# Altium PCB Relay_module.PcbDoc
Units mil, origin at the board's own origin, x right, y up, seen from the top; angles counter-clockwise.
Board outline 3415 x 1995 mil, 2 copper layers (Top Layer, Bottom Layer); 18 components, 21 nets, 53 pads, 2 vias.
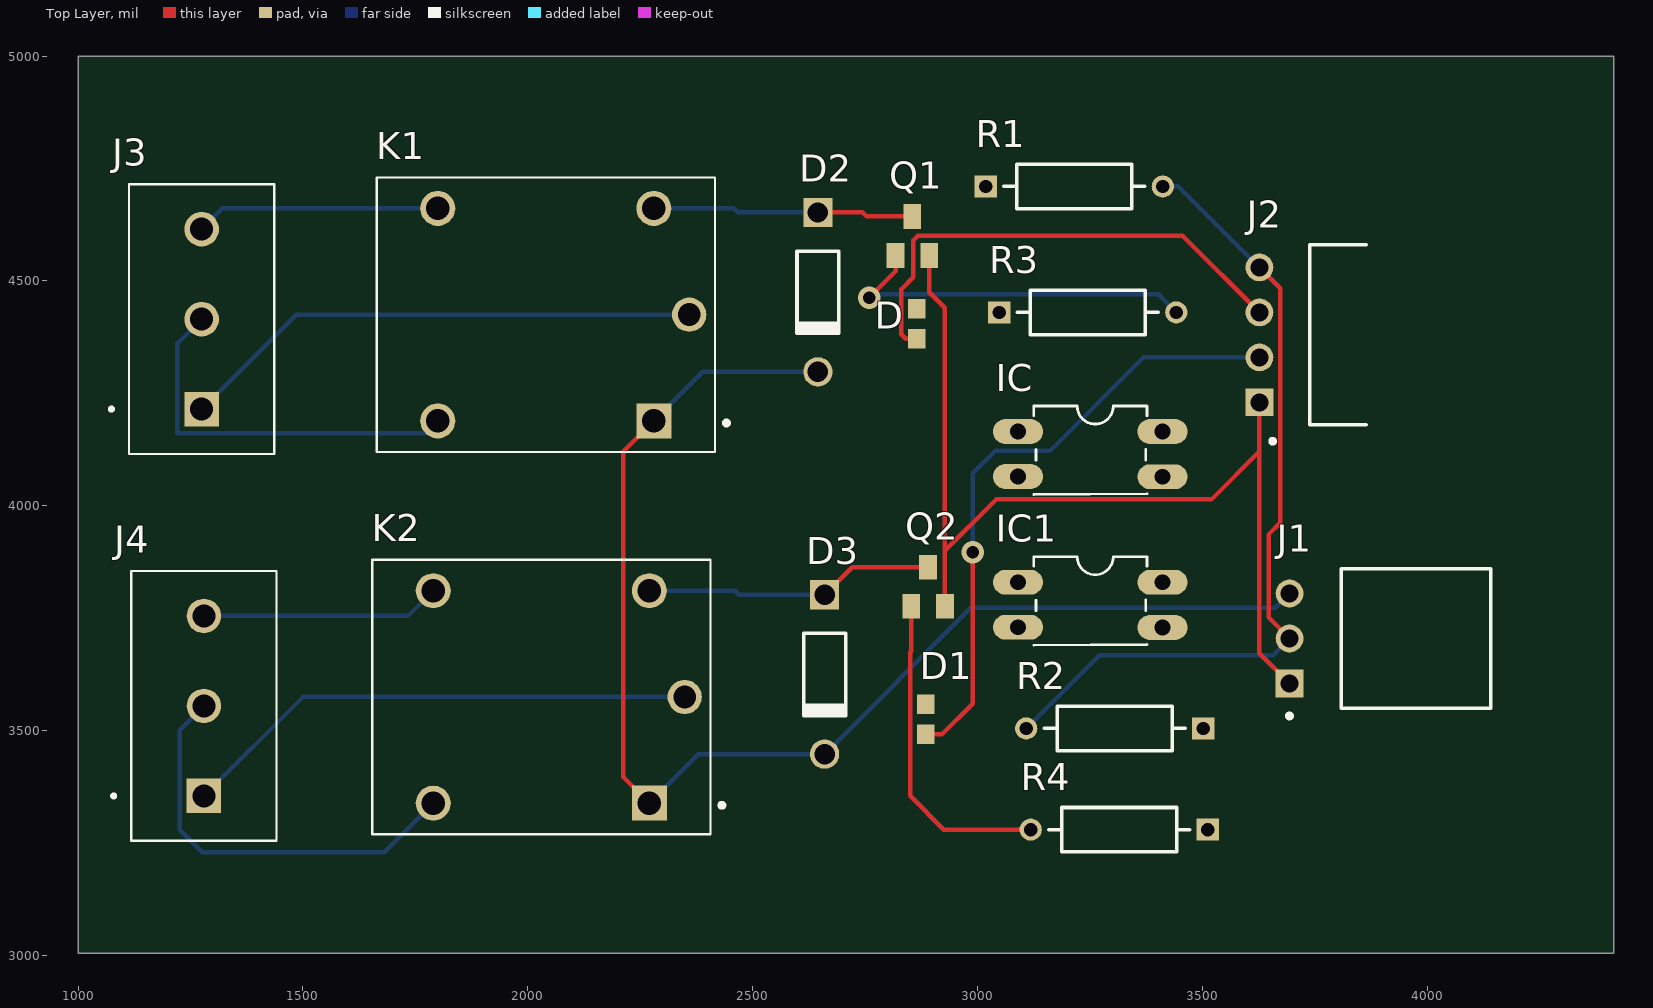
[diagram p0: Top Layer view]
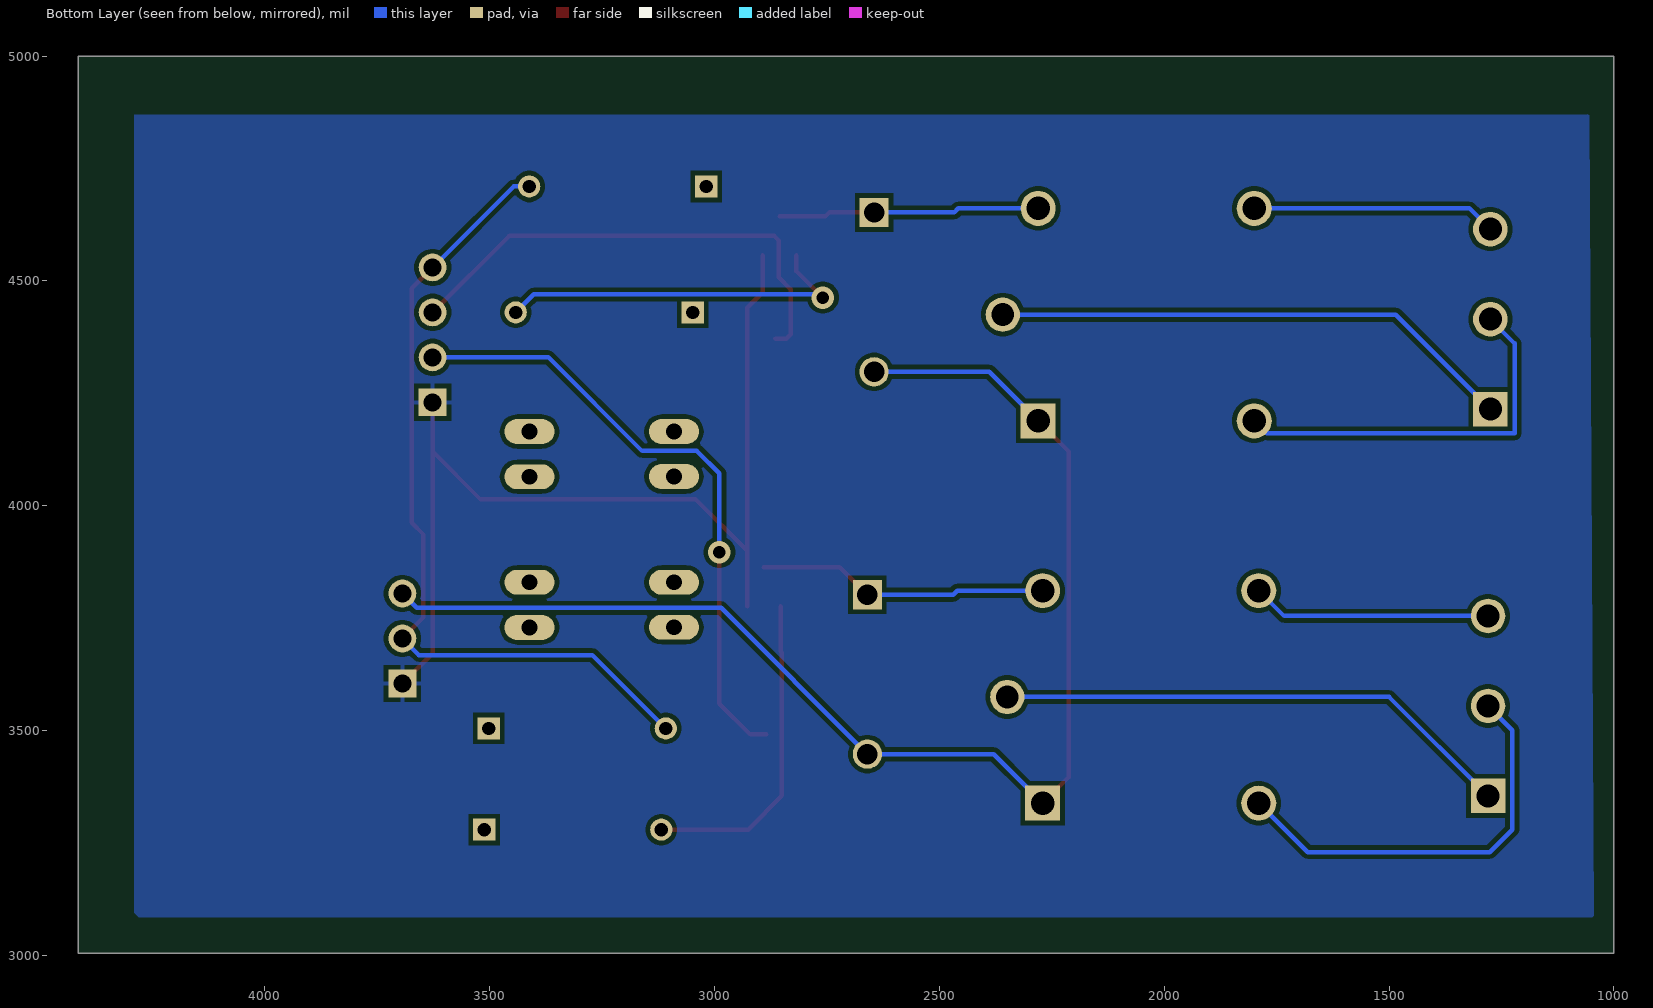
[diagram p1: Bottom Layer view, seen from below]
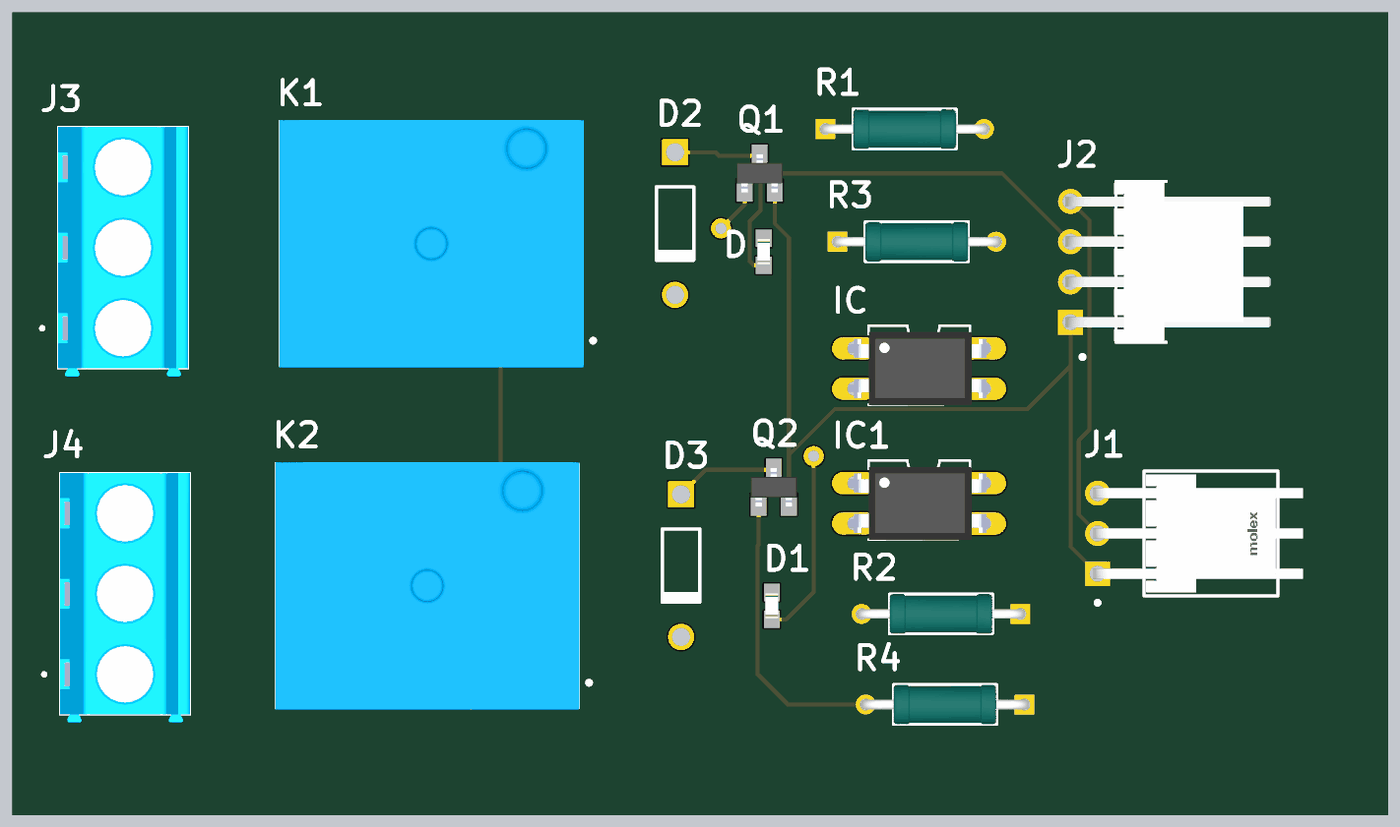
[diagram p2: 3D render of the assembled board from above, using the file's embedded part models]

## Layer stack, top to bottom
Top Solder: solder mask 0.4, Solder Resist, Dk 3.5
Top Layer: signal copper 1.4
Dielectric 1: dielectric 12.6, FR-4, Dk 4.8
Bottom Layer: signal copper 1.4
Bottom Solder: solder mask 0.4, Solder Resist, Dk 3.5

## Board outline
1000,3005 4415,3005 4415,5000 1000,5000

## Design rules (kind name [scope] priority, off if disabled: settings)
Clearance [All] p1: gap=6 ignorepadtopadclearanceinfootprint=FALSE
PolygonConnect [All] p1: connectstyle=Relief reliefconductorwidth=10 reliefentries=4 polygonreliefangle="90 Angle" airgapwidth=10
RoutingVias [All] p1: holewidth=28 width=50 viastyle="Through Hole" minholewidth=28 minwidth=50 maxholewidth=28 maxwidth=50
SilkToSolderMaskClearance [IsPad] p1: minsilkscreentomaskgap=5 clearancetoexposedcopper=TRUE
SolderMaskExpansion [All] p1: expansion=4 istentingtop=FALSE
Width [All] p1: maxlimit=10 minlimit=10 preferedwidth=10
29 further rules are at their usual default settings.

## Components (designator, comment, footprint, x,y, rotation, side; value= is the part's Value field where it differs from the comment)
D "LTST-C193TBKT-5A" 0603 2865,4405 r90 top
D1 "LTST-C193TBKT-5A" 0603 2885,3525 r90 top
D2 "1N4003-T" DIOD-DO-41-P-2_V 2645,4475 r270 top
D3 "1N4003-T" DIOD-DO-41-P-2_V 2660,3625 r270 top
IC "LTV-817" DIP-4 3110,4165 r270 top
IC1 "LTV-817" DIP-4 3110,3830 r270 top
J1 "22-05-3031" FP-22-05-3031-MFG 3975,3705 r90 top
J2 "22-05-3041" FP-22-05-3041-MFG 3905,4380 r90 top
J3 "TB006-508-03BE" CUI_TB006-508-03BE 1275,4215 r90 top
J4 "TB006-508-03BE" CUI_TB006-508-03BE 1280,3355 r90 top
K1 "SRD-05VDC-SL-C" RELAY_SRD-05VDC-SL-C 2040,4425 r180 top
K2 "SRD-05VDC-SL-C" RELAY_SRD-05VDC-SL-C 2030,3575 r180 top
Q1 "BCW31*" SOT23-BEC 2855,4600 r0 top
Q2 "BCW31*" SOT23-BEC 2890,3820 r0 top
R1 "MRS25000C1000FRP00" FP-MRS25-MFG 3215,4710 r0 top
R2 "MRS25000C1000FRP00" FP-MRS25-MFG 3305,3505 r180 top
R3 "MRS25000C1000FRP00" FP-MRS25-MFG 3245,4430 r0 top
R4 "MRS25000C1000FRP00" FP-MRS25-MFG 3315,3280 r180 top

## Footprints (in the part's own frame and the unit in brackets; to place one, negate y for a bottom-side part, rotate by r counter-clockwise, add the part's x,y. Pads: shape width x height; smd on the part's side, far side on the other; paste and mask are expansions set on the pad)
0603 [mm]
  rect 1.1x1 smd: 1(-0.85,0) 2(0.85,0)
  body extent -0.8,-0.4 0.8,0.4, height 0.36
CUI_TB006-508-03BE [mm]
  rect 1.95x1.95 / inner round 1.95 / far side rect 1.95x1.95 hole 1.3: 1(0,0)
  round 1.95 hole 1.3: 2(5.08,0) 3(10.16,0)
  silkscreen extent -2.54,-4.1 12.7,5.2, body extent -3.04,-4.1 12.7,4.1, height 10
DIOD-DO-41-P-2_V [mm] "2-Leads, Axial Lead, Body 4.635x2.36mm, Pin Spacing 9mm"
  rect 1.65x1.65 hole 1.15: 1(-4.5,0)
  round 1.65 hole 1.15: 2(4.5,0)
  silkscreen extent -2.32,-1.18 2.32,1.18, body extent -4.93,-1.18 4.93,1.18, height 2.35
DIP-4 [mm]
  oval 1.408x2.816 hole 0.9: P$1(0,-0.508) P$2(2.54,-0.508) P$3(2.55,7.65) P$4(0,7.65)
  silkscreen extent -1.44,0.38 3.56,6.77, body extent -1.03,-0.89 3.57,8.17, height 5
FP-22-05-3031-MFG [mm]
  rect 1.57x1.57 hole 1.02 paste-2539.97 mask+0: 1(-2.54,7.14)
  round 1.57 hole 1.02 paste-2539.97 mask+0: 2(0,7.14) 3(2.54,7.14)
  silkscreen extent -4.5,-4.21 3.94,7.27, body extent -4.04,-6.02 4.04,8.03, height 0.25
FP-22-05-3041-MFG [mm]
  rect 1.57x1.57 hole 1.02 paste-2539.97 mask+0: 1(-3.81,7.072)
  round 1.57 hole 1.02 paste-2539.97 mask+0: 2(-1.27,7.072) 3(1.27,7.072) 4(3.81,7.072)
  silkscreen extent -6.13,1.03 5.08,6.44, body extent -5.18,-6.28 5.18,7.96, height 0.25
FP-MRS25-MFG [mm]
  rect 1.25x1.25 hole 0.75 paste-2539.97 mask+0: 1(-5,0)
  round 1.25 hole 0.75 paste-2539.97 mask+0: 2(5,0)
  silkscreen extent -3.97,-1.25 3.97,1.25, body extent -5.72,-1.35 5.72,1.35, height 0.25
RELAY_SRD-05VDC-SL-C [mm]
  rect 1.98x1.98 / inner round 1.98 / far side rect 1.98x1.98 hole 1.32: A1(-6.1,6)
  round 1.98 hole 1.32: A2(-6.1,-6) NC(6.1,6) NO(6.1,-6)
  round 1.935 hole 1.29: COM(-8.1,0)
  silkscreen extent -10.3,-7.75 9.55,7.75, body extent -9.6,-7.8 9.6,7.8, height 15.8
SOT23-BEC [mm]
  rect 1x1.4 smd: B(-0.95,-1.1) C(0,1.1) E(0.95,-1.1)
  body extent -1.45,-1.2 1.45,1.2, height 1.14

## Part data
D D1: "Blue 470nm LED Indication - Discrete 2.8V 0603 _1608 Metric_", Package="0603 Lite-On", Digi-Key_Part_Number=160-1827-1-ND, Digi-Key_Purchase_URL=https://www.digikey.com/product-detail/en/lite-on-inc/LTST-C193TBKT-5A/160-1827-1-ND/2355044?utm_source=snapeda&utm_medium=aggregator&utm_campaign=symbol, MF="Lite-On Inc.", MP=LTST-C193TBKT-5A, SnapEDA_Link=https://www.snapeda.com/parts/LTST-C193TBKT-5A/Lite-On%20Inc./view-part/350303/?ref=snap
D2 D3: library part CMP-0639-00004-2, "1.0 A Rectifier, 15 pF, 200 V, -65 to 150 degC, 2-Pin DO-41 Plastic, RoHS, Tape and Reel", Manufacturer="Diodes Inc", Max. Average Rectified Current IO (A)=1, Operating Temperature Range (degC)="-65 to 150", ComponentLink1Description="Manufacturer URL", ComponentLink1URL=http://diodes.com/, ComponentLink2Description=Datasheet, ComponentLink2URL=http://diodes.com/datasheets/ds28002.pdf, CT (pF)=15, DatasheetVersion="Rev. 8-2", Max. IFSM (A)=30, Max. IR (uA)=5, Mounting Technology="Through Hole", PackageDescription="2-Pin Axial Lead, Body 4.635 x 2.36 mm, Lead Spread 25.4 mm", PackageReference=DO-41-P-2, Packing="Tape and Reel", PartNumber=1N4003-T, RoHS=TRUE, VF (V)=1, VRRM (V)=200
IC IC1: "Optoisolator Transistor Output 5000Vrms 1 Channel 4-SMD", Package="DIP-4 Lite-On Electronics", Availability=Unavailable, MF="Lite-On Electronics", MP=LTV-817, Price=None, SnapEDA_Link=https://www.snapeda.com/parts/LTV-817/ICS/view-part/4478599/?ref=snap
J1: library part CMP-04776-000253-1, "CONN HEADER R/A 3POS 2.54MM", Color=White, Contact Resistance=10mR, Current Rating=4A, Flammability Rating="UL94 V-0", Insulation Resistance=50GR, Max Operating Temperature=75°C, Min Operating Temperature=0°C, Package Quantity=2000, Voltage Rating=250V, Approvals=UL, Contact Material=Brass, Contact Mating Length=0.264inch, Contact Plating=Tin, Contact Type="Male Pin", Depth=12.83mm, Fastening Type=Friction, Gender=Male, Glow Wire Compliant=Non-compliant, Halogen Free="Low Halogen", Height=6.35mm, Housing Color=White, Housing Material=Nylon, Lead Free="Lead Free", Lead Pitch=2.54mm, Length=7.62mm, Max Current Rating=4A, Mount="Through Hole", Number of Circuits=3, Number of Contacts=3, Number of Positions=3, Number of Rows=1, Orientation="Right Angle", Packaging=Bulk, Pitch=2.54mm, Radiation Hardening=No, RoHS Compliant=Yes, Series=7478, Termination=Solder, Voltage Rating (DC)=250V
J2: library part CMP-2000-05533-2, "CONN HEADER R/A 4POS 2.54MM", Current Rating=4A, Manufacturer=Molex, Package=0, Temperature="-40°C to +80°C", Temperature Range High=+80°C, Temperature Range Low=-40°C, Voltage Rating=500V, Automotive=No, Category=Conn, ComponentLink2Description=Datasheet, ComponentLink2URL=https://www.molex.com/webdocs/datasheets/pdf/en-us/0022053041_PCB_HEADERS.pdf, Conn Gender=Male, Conn Orientation="Right Angle", Contact Material=Tin,Nickel, Device Class L1=Connectors, Device Class L2="Headers and Wire Housings", Device Class L3=unset, Digikey Description="CONN HEADER R/A 4POS 2.54MM", Footprint Url=https://www.molex.com/pdm_docs/sd/022053041_sd.pdf, Height=6.6mm, Lead Free=Yes, Manufacturer Part Number=22-05-3041, Number of Contacts=4, Number of Rows=1, Octopart=https://octopart.com/22-05-3041-molex-2579, Pitch=2.54mm, RoHS=TRUE
J3 J4: "2~24 Poles, Screw Type, Horizontal, 5.08 Pitch, 26~14 (AWG), Terminal Block Connector", Package=None, Availability="In Stock", Check_prices=https://www.snapeda.com/parts/TB006-508-03BE/CUI+Devices/view-part/?ref=eda, CUI_purchase_URL=https://www.cuidevices.com/product/interconnect/connectors/terminal-blocks/tb006-508-series?utm_source=snapeda.com&utm_medium=referral&utm_campaign=snapedaBOM, MF="CUI Devices", MP=TB006-508-03BE, Price=None, Purchase-URL=https://pricing.snapeda.com/search/part/TB006-508-03BE/?ref=eda, SnapEDA_Link=https://www.snapeda.com/parts/TB006-508-03BE/CUI+Devices/view-part/?ref=snap
K1 K2: "5V Trigger Relay Module For Arduino And Raspberry Pi 5V Trigger Relay Module For Arduino And Raspberry Pi", Package="NON STANDARD-5 Songle Relay", Availability="Not in stock", Check_prices=https://www.snapeda.com/parts/SRD-05VDC-SL-C/Songle+Relay/view-part/?ref=eda, MF="Songle Relay", MP=SRD-05VDC-SL-C, Price=None, SnapEDA_Link=https://www.snapeda.com/parts/SRD-05VDC-SL-C/Songle+Relay/view-part/?ref=snap
Q1 Q2: "Bipolar (BJT) Transistor NPN General Purpose Amplifier Surface Mount", Package="SOT-23 ON Semiconductor", Check_prices=https://www.snapeda.com/parts/BCW31/Onsemi/view-part/?ref=eda, MF="ON Semiconductor", MP=BCW31, SnapEDA_Link=https://www.snapeda.com/parts/BCW31/Onsemi/view-part/?ref=snap
R1 R2 R3 R4: library part CMP-00030-42757237-1, "MRS25000C1000FRP00 Resistor, 100 Ohm, ± 1%, 600 mW, Axial Leaded, Metal Film (Thin Film), Professional", Case/Package=Axial, Max Operating Temperature=155°C, Max Power Dissipation=600mW, Min Operating Temperature=-55°C, Resistance=100Ω, Temperature Coefficient=50ppm/°C, Tolerance=1%, Voltage Rating=350V, Composition="Metal Film, Thin Film", Contact Plating=Tin, Diameter=2.5mm, Lead Diameter=600µm, Lead Free="Lead Free", Length=6.5mm, Military Standard=Not, Mount="Through Hole", NexarPartId=42757237, Number of Pins=2, Number of Terminations=2, Packaging="Tape & Reel (TR)", Power Rating=600mW, Radiation Hardening=No, REACH SVHC=Unknown, RoHS=Compliant, Schedule B="8533210090, 8533210090", Termination=Axial, Voltage Rating (DC)=350V, Width=2.5mm

## Via types
v1: diameter 50, hole 28, Top Layer to Bottom Layer, 2 vias

## Nets (pads, with @x,y where several pads share a name; then routed paths per layer and width w, separated by ;. In a path a pad name is that pad's centre, name@x,y a point inside that pad or via, vN(x,y) a via of type N, cw(c..) or ccw(c..) an arc to the next point about the centre after c; other vN are vias at no path point)
GND: J1.1 J2.1 Q1.E Q2.E | length 2237.9
  Top Layer w10: Q1.E 2892.4,4475 2927.4,4440 2927.4,3900 ; Q2.E 2927.4,3900 ; J2.1 3626.56,4120.56 ; J1.1 3626.56,3672.34 3626.56,4120.56 ; 2927.4,3900 3041.4,4014 3520,4014 3626.56,4120.56
IN1: D.1 J2.3 | length 1102.9
  Top Layer w10: D.1 2840,4371.54 2830,4381.54 2830,4481 2857,4508 2857,4590 2867,4600 3456.56,4600 J2.3
IN2: D1.1 J2.2 | length 1388.8
  Top Layer w10: D1.1 2920.54,3491.54 2989,3560 v1(2989,3897)
  Bottom Layer w10: v1(2989,3897) 2989,4072 3039,4122 3161,4122 3369,4330 J2.2
NetD1_2: D1.2
NetD2_1: D2.1 K1.A2 Q1.C | length 582.3
  Top Layer w10: D2.1 2745,4652.17 2753.86,4643.31 Q1.C
  Bottom Layer w10: K1.A2 2458,4661.22 2467.05,4652.17 D2.1
NetD3_1: D3.1 K2.A2 Q2.C | length 648.9
  Top Layer w10: D3.1 2721.14,3863.31 Q2.C
  Bottom Layer w10: K2.A2 2460,3811.22 2469.05,3802.17 D3.1
NetD_2: D.2
NetIC1_1: R2.1
NetIC1_3: R4.1
NetIC_1: R1.1
NetIC_3: R3.1
NetJ3_1: J3.1 K1.COM | length 1170.9
  Bottom Layer w10: J3.1 1485,4425 K1.COM
NetJ3_2: J3.2 K1.NC | length 866.7
  Bottom Layer w10: J3.2 1221,4361 1221,4161 1772.06,4161 K1.NC
NetJ3_3: J3.3 K1.NO | length 544
  Bottom Layer w10: J3.3 1321.22,4661.22 K1.NO
NetJ4_1: J4.1 K2.COM | length 1160
  Bottom Layer w10: J4.1 1500,3575 K2.COM
NetJ4_2: J4.2 K2.NC | length 927
  Bottom Layer w10: J4.2 1226,3501 1226,3280 1276,3230 1681.06,3230 K2.NC
NetJ4_3: J4.3 K2.NO | length 533.1
  Bottom Layer w10: J4.3 1733.62,3755 K2.NO
NetQ1_B: Q1.B R3.2 | length 820.3
  Top Layer w10: v1(2759,4463) 2817.6,4521.6 Q1.B
  Bottom Layer w10: v1(2759,4463) 2766,4470 3401.85,4470 R3.2
NetQ2_B: Q2.B R4.2 | length 722
  Top Layer w10: Q2.B 2852.6,3677 2850,3674.4 2850,3355 2925,3280 R4.2
"RY VCC": D2.2 D3.2 J1.3 K1.A1 K2.A1 | length 2929.2
  Top Layer w10: K2.A1 2212,3396.94 2212,4120.62 K1.A1
  Bottom Layer w10: K2.A1 2379.21,3447.83 D3.2 2985.17,3773 3661.9,3773 J1.3 ; K1.A1 2389.21,4297.83 D2.2
VCC: J1.2 J2.4 R1.2 R2.2 | length 1832.3
  Top Layer w10: J2.4 3673,4483.56 3673,3962 3647,3936 3647,3751.9 J1.2
  Bottom Layer w10: R2.2 3271.15,3668 3656.9,3668 J1.2 ; R1.2 3446.56,4710 J2.4
pads on no net: IC1.P$1 IC1.P$2 IC1.P$3 IC1.P$4 IC.P$1 IC.P$2 IC.P$3 IC.P$4

## Polygon pours and split planes (outlines as drawn)
GND on Bottom Layer "NONET_L-01_P-001" (solid, remove dead copper, pour order 3): 1055,4875 1060,4870 4290,4870 4290,3095 4280,3085 1045,3085